# Altium PCB BEE-PC_EXP_V100.PcbDoc (part 5 of 7)
Units mm, origin at the board's own origin, x right, y up, seen from the top; angles counter-clockwise.
Board outline 180 x 79.98 mm, 6 copper layers (L1 TOP, L2 GND 1, L3 SIGNAL, L4 PWR, L5 GND 2, L6 BOT), stack 1.536 mm thick; 1146 components, 909 nets, 3933 pads, 1234 vias.
Unrouted connection lines stored in the file: 1783.
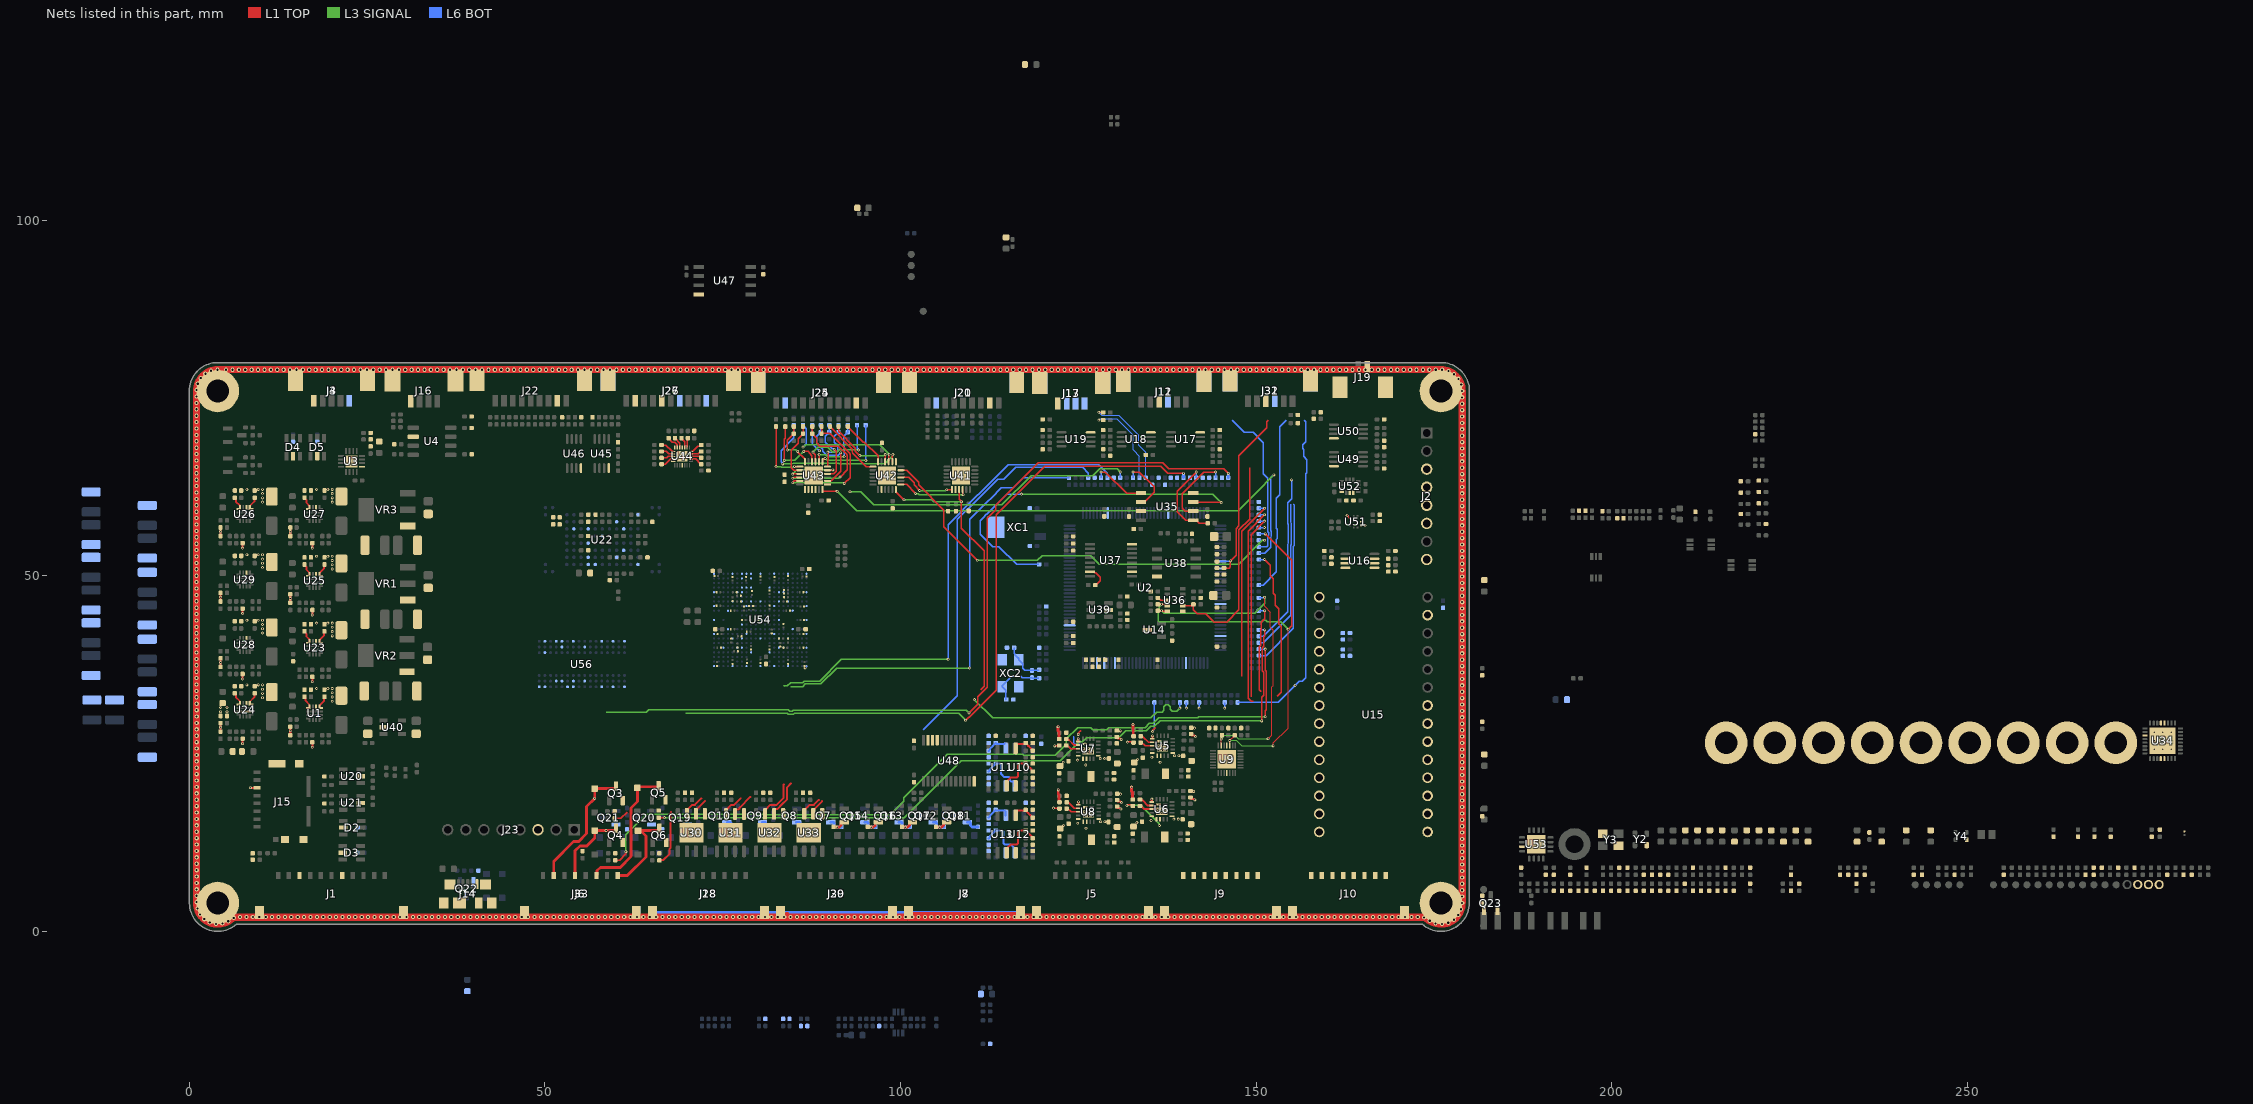
[diagram p5: the nets of this part, all layers, seen from the top]

## Via types
v1: diameter 0.6, hole 0.3, L1 TOP to L6 BOT, 563 vias
v2: diameter 0.4, hole 0.2, L1 TOP to L6 BOT, tented both sides, 344 vias
v3: diameter 0.4, hole 0.2, L1 TOP to L6 BOT, 327 vias

## Nets (pads, with @x,y where several pads share a name; then routed paths per layer and width w, separated by ;. In a path a pad name is that pad's centre, name@x,y a point inside that pad or via, vN(x,y) a via of type N, cw(c..) or ccw(c..) an arc to the next point about the centre after c; other vN are vias at no path point) (continued)
GND: C1.1 C2.1 C3.1 C4.1 C5.1 C6.2 C7.1 C8.1 C9.1 C10.1 C11.1 C12.1 C13.1 C14.1 C15.1 C16.1 C17.2 C18.2 C19.1 C20.1 C21.1 C22.1 C23.1 C24.1 C25.1 C26.1 C27.1 C28.1 C29.1 C30.1 C31.1 C32.1 C33.1 C34.1 C35.1 C36.1 C37.1 C38.1 C39.1 C40.1 C41.1 C42.1 C43.1 C44.1 C45.1 C46.1 C47.1 C48.1 C49.1 C50.1 C53.1 C54.1 C57.1 C58.1 C59.1 C60.1 C61.1 C62.1 C63.1 C64.1 C65.1 C66.1 C67.1 C68.1 C69.1 C70.1 C71.1 C72.1 C75.1 C76.1 C79.1 C80.1 C81.1 C82.1 C83.1 C84.1 C85.1 C86.1 C87.1 C88.1 C89.1 C90.1 C91.1 C92.1 C93.1 C94.1 C95.1 C96.1 C97.1 C98.1 C99.1 C100.1 C101.1 C102.1 C103.1 C104.1 C105.1 C106.1 C107.1 C108.1 C109.1 C110.1 C111.1 C112.1 C113.1 C114.1 C115.1 C116.1 C117.1 C118.1 C119.1 C120.1 C121.1 C122.1 C123.1 C124.1 C125.1 C126.1 C127.1 C128.1 C129.1 C130.1 C131.1 C132.1 C133.1 C134.1 C135.1 C136.1 C137.1 C138.1 C139.1 C140.1 C141.1 C142.2 C143.1 C144.1 C145.1 C146.1 C147.1 C148.1 C149.1 C150.1 C151.1 C152.1 C153.1 C154.1 C155.1 C156.1 C157.2 C158.1 C159.1 C160.1 C161.1 C162.1 C163.1 C164.1 C165.1 C166.1 C167.1 C168.1 C169.1 C170.1 C171.1 C172.1 C173.1 C174.1 C175.2 C176.1 C177.1 C178.1 C179.1 C180.2 C181.1 C182.2 C183.2 C184.1 C185.1 C186.1 C187.1 C188.1 C189.1 C190.2 C191.1 C192.1 C193.1 C194.1 C195.1 C196.1 C197.1 C198.1 C199.1 C200.1 C201.1 C202.1 C203.1 C204.1 C205.1 C206.1 C207.1 C208.1 C209.1 C210.1 C211.1 C212.1 C213.1 C214.1 C215.1 C216.1 C217.1 C218.1 C219.1 C220.2 C221.2 C222.2 C223.2 C224.1 C225.2 C226.1 C227.2 C228.1 C229.2 C230.2 C231.2 C232.2 C233.2 C234.2 C235.2 C236.2 C237.2 C238.2 C239.2 C240.2 C241.2 C242.2 C243.2 C244.2 C245.2 C246.2 C247.2 C248.2 C249.2 C250.2 C251.2 C252.2 C253.1 C254.2 C255.2 C256.2 C257.2 C258.2 C259.2 C260.2 C261.2 C262.2 C263.2 C264.2 C265.2 C266.2 C267.2 C268.2 C269.2 C270.2 C271.2 C272.2 C273.1 C274.2 C275.2 C276.2 C277.2 C278.2 C279.2 C280.2 C281.2 C282.2 C283.2 C284.2 C285.1 C286.2 C287.1 C288.2 C289.1 C290.1 C292.1 C294.1 C296.1 C298.1 C300.1 C302.1 C304.1 C306.1 C308.1 C310.1 C312.1 C314.1 C316.1 C318.1 C320.1 C322.1 C324.1 C326.1 C328.1 C330.1 C331.2 C332.2 C333.2 C334.2 C335.2 C336.2 C337.2 C338.2 C340.2 C341.2 C342.2 C343.2 C344.2 C345.2 C346.2 C347.2 C348.2 C349.2 C350.2 C353.2 C354.2 D1.2 D2.2 D3.2 D4.2 D5.2 D10.2 D11.2 D12.2 D13.2 D14.2 D15.2 D16.2 H2.1 H3.1 H4.1 H5.1 H7.1 H8.1 H9.1 H10.1 H11.1 H12.1 H13.1 H14.1 H15.1 J1.3 J1.7 J1.M1 J1.M2 J2.3 J3.5 J3.M1 J3.M2 J4.5 J4.M1 J4.M2 J5.M1 J5.M2 J6.M1 J6.M2 J7.M1 J7.M2 J8.M1 J8.M2 J9.M1 J9.M2 J10.M1 J10.M2 J11.4 J11.M1 J11.M2 J12.4 J12.M1 J12.M2 J13.4 J13.M1 J13.M2 J14.5 J14.6 J15.G1 J15.G2 J15.G3 J15.G4 J15.P6 J16.4 J16.M1 J16.M2 J17.4 J17.M1 J17.M2 J18.M1 J18.M2 J19.2 J19.M1 J19.M2 J20.2 J20.M1 J20.M2 J21.2 J21.M1 J21.M2 J22.2 J22.M1 J22.M2 J23.3 J24.2 J24.M1 J24.M2 J25.2 J25.M1 J25.M2 J26.7 J26.10 J26.M1 J26.M2 J27.7 J27.10 J27.M1 J27.M2 J28.M1 J28.M2 J29.M1 J29.M2 J30.M1 J30.M2 J31.4 J31.M1 J31.M2 J32.4 J32.M1 J32.M2 J33.M1 J33.M2 Q3.2 Q4.2 Q5.2 Q6.2 Q7.2 Q8.2 Q9.2 Q10.2 Q11.2 Q12.2 Q13.2 Q14.2 Q15.2 Q16.2 Q17.2 Q18.2 Q19.2 Q20.2 Q21.2 Q22.2 Q23.2 R6.1 R7.2 R8.1 R83.1 R88.2 R89.2 R95.2 R96.2 R103.2 R105.2 R111.2 R113.2 R115.2 R119.1 R120.1 R122.1 R126.1 R128.1 R130.1 R132.1 R137.1 R138.1 R143.1 R144.1 R149.1 R150.1 R155.1 R156.1 R159.1 R161.1 R168.2 R174.1 R175.1 R178.2 R182.2 R190.2 R221.1 R226.1 R228.1 R229.2 R230.1 R241.1 R242.1 R243.2 R244.2 R245.1 R246.1 R254.1 R255.2 R259.2 R260.1 R261.1 R262.1 R268.2 R269.1 R270.1 R272.2 R273.2 R275.2 R276.2 R278.2 R279.2 R281.2 R282.2 R314.1 R319.1 R320.2 R329.1 R338.1 R340.2 R344.1 R347.1 R348.2 R350.2 R352.2 R354.2 R358.1 R360.1 R401.1 R402.1 R422.1 R449.1 R466.2 R473.2 R477.1 R483.1 R484.1 R485.1 R486.1 R491.1 R492.1 R493.1 R494.1 R499.1 R500.1 R501.1 R502.1 R507.2 R512.1 R513.1 R514.1 R515.1 R532.2 R534.2 R536.1 R543.1 R547.1 R549.1 R551.1 R572.2 R573.2 R575.1 R578.2 TP4.0 U1.8 U2.8 U2.44 U2.61 U2.95 U2.115 U2.135 U2.138 U3.1 U3.17 U4.6 U5.1 U5.5 U5.10 U5.19 U5.21 U5.22 U6.1 U6.5 U6.10 U6.19 U6.21 U6.22 U7.1 U7.5 U7.10 U7.19 U7.21 U7.22 U8.1 U8.5 U8.10 U8.19 U8.21 U8.22 U9.11 U9.25 U9.29 U10.4 U11.4 U12.4 U13.4 U14.3 U15.1 U15.27 U16.4 U17.4 U18.4 U19.4 U20.2 U21.2 U22.G2@56.086,58.6 U22.G3@56.086,57.6 U22.G4@56.086,56.6 U22.G5@56.086,55.6 U22.G6@56.086,54.6 U22.G7@56.086,53.6 U22.G8@56.086,52.6 U22.G9@56.086,51.6 U22.H2@57.086,58.6 U22.H9@57.086,51.6 U22.J5@58.086,55.6 U22.L3@60.086,57.6 U22.L8@60.086,52.6 U22.M4@61.086,56.6 U22.M7@61.086,53.6 U22.P2@63.086,58.6 U22.P9@63.086,51.6 U23.8 U24.8 U25.8 U26.8 U27.8 U28.8 U29.8 U30.1 U30.EPAD U31.1 U31.EPAD U32.1 U32.EPAD U33.1 U33.EPAD U34.3 U34.12 U34.13 U34.28 U34.29 U34.33 U35.4 U36.6 U37.8 U38.4 U39.2 U40.2 U41.2 U41.25 U42.2 U42.25 U43.2 U43.25 U44.5 U44.9 U44.21 U44.24 U44.25 U45.4 U46.4 U47.4 U48.12 U48.21 U49.4 U50.4 U51.3 U51.8 U51.9 U52.6 U52.7 U53.3 U53.17 U54.A1 U54.A5 U54.A8 U54.A11 U54.A14 U54.A17 U54.A21 U54.AA1 U54.AA8 U54.AA11 U54.AA14 U54.AA17 U54.AA21 U54.D9 U54.D13 U54.E1 U54.E7 U54.E15 U54.E21 U54.F5 U54.F17 U54.G5 U54.G7 U54.G11 U54.G15 U54.G17 U54.H1 U54.H8 U54.H14 U54.H21 U54.J4 U54.J18 U54.K11 U54.L1 U54.L7 U54.L11 U54.L15 U54.L21 U54.N4 U54.N18 U54.P1 U54.P8 U54.P14 U54.P21 U54.R5 U54.R7 U54.R11 U54.R15 U54.R17 U54.T5 U54.T17 U54.U1 U54.U7 U54.U15 U54.U21 U54.V9 U54.V13 U54.W5 U56.A9 U56.B1 U56.B3 U56.B9 U56.D1 U56.D8 U56.E1 U56.E2 U56.E8 U56.F9 U56.G1 U56.G8 U56.G9 U56.J2 U56.J8 U56.M1 U56.M9 U56.P1 U56.P9 U56.T1 U56.T9 VR1.1 VR2.1 VR3.1 XC1.3 XC2.2 XC2.4 Y2.2 Y3.2 Y3.4 Y4.2 | length 635.7
  L1 TOP w0.2: v3(162.8,58.5) 163.2,58.1 U51.3@163.213,58.1 ; U51.8@164.787,57.1 v3(165.3,57.1)
  L1 TOP w0.25: v2(125,27.7) 125.029,27.729 125.029,27.915 125.314,28.2 125.325,28.2
  L1 TOP w0.254: J30.M1@83.567,2.258 83.893,2.583 84.143,2.583 84.17,2.61 ; J30.M2@98.785,2.61 J30.M2@98.855,2.68 ; J8.M1@101.145,2.61 116.785,2.61 J8.M2@116.855,2.68
  L1 TOP w0.28: v3(8.6,20.2) J15.P6@9.5,20.2 ; R113.2@130.325,27.31 130.489,27.146 130.871,27.146 131.018,27 v2(131.05,27) ; R115.2@130.361,18.428 130.525,18.264 130.908,18.264 131.054,18.118 v2(131.086,18.118) ; R105.2@140.675,18.81 140.839,18.646 141.221,18.646 141.368,18.5 v2(141.4,18.5) ; R103.2@140.775,27.71 140.939,27.546 141.321,27.546 141.468,27.4 v2(141.5,27.4)
  L1 TOP w0.3: R228.1@4.4,28.133 v2(4.4,28.714) C141.1@4.4,29.295 ; R260.1@4.4,37.233 v2(4.4,37.814) C151.1@4.4,38.395 ; R269.1@4.4,46.433 v2(4.4,47.014) C172.1@4.4,47.595 ; R242.1@4.4,55.633 v2(4.4,56.214) C152.1@4.4,56.795 ; v3(7.5,26.4) R229.2@7.5,27.075 ; v3(7.5,35.5) R259.2@7.5,36.175 ; v3(7.5,44.7) R268.2@7.5,45.375 ; v3(7.5,53.9) R244.2@7.5,54.575 ; R6.1@14.2,27.633 v2(14.2,28.214) C3.1@14.2,28.795 ; R241.1@14.2,46.233 v2(14.2,46.814) C165.1@14.2,47.395 ; R254.1@14.2,55.633 v2(14.2,56.214) C162.1@14.2,56.795 ; v3(17.3,25.9) R7.2@17.3,26.575 ; v3(17.3,35.1) R221.1@17.3,35.775 ; v3(17.3,44.5) R243.2@17.3,45.175 ; v3(17.3,53.9) R255.2@17.3,54.575 ; U7.1@124.988,26.725 124.988,27.088 v2(125,27.1) ; U8.1@125.024,17.843 125.024,18.206 v2(125.036,18.218) ; C75.1@130.325,28.2 v2(130.9,28.2) ; C76.1@130.361,19.318 v2(130.936,19.318) ; U6.1@135.337,18.225 135.337,18.588 v2(135.35,18.6) ; U5.1@135.437,27.125 135.437,27.488 v2(135.45,27.5) ; C54.1@140.675,19.7 v2(141.25,19.7) ; C53.1@140.775,28.6 v2(141.35,28.6)
  L1 TOP w0.4: R499.1@90.6,14.675 v3(91.1,14.675) 91.415,14.675 91.649,14.909 91.649,15.25 91.749,15.35 Q15.2@92.1,15.35 ; R500.1@95.4,14.675 v3(95.9,14.675) 96.215,14.675 96.449,14.909 96.449,15.25 96.549,15.35 Q16.2@96.9,15.35 ; R501.1@100.2,14.675 v3(100.7,14.675) 101.015,14.675 101.249,14.909 101.249,15.25 101.349,15.35 Q17.2@101.7,15.35 ; R502.1@105,14.675 v3(105.5,14.675) 105.815,14.675 106.049,14.909 106.049,15.25 106.149,15.35 Q18.2@106.5,15.35 ; v2(122.157,28.793) 122.157,28.2 122.257,28.1 122.275,28.1 C81.1@122.275,27.2 ; v2(122.194,19.911) 122.194,19.318 122.294,19.218 122.311,19.218 C82.1@122.311,18.318 ; v2(132.507,20.293) 132.507,19.7 132.607,19.6 132.625,19.6 C60.1@132.625,18.7 ; v2(132.7,29.1) 132.7,28.525 132.725,28.5 C59.1@132.725,27.6
  L1 TOP w1: v1@1,75.993 1,75.222 1,74.322 1.001,73.422 1.001,72.522 1.001,71.622 1.001,70.722 1.002,69.822 1.002,68.922 1.002,68.022 1.002,67.122 1.003,66.222 1.003,65.322 1.003,64.422 1.003,63.522 1.004,62.622 1.004,61.722 1.004,60.822 1.004,59.922 1.005,59.022 1.005,58.122 1.005,57.222 1.005,56.322 1.006,55.422 1.006,54.522 1.006,53.622 1.006,52.722 1.007,51.822 1.007,50.922 1.007,50.022 1.007,49.122 1.008,48.222 1.008,47.322 1.008,46.422 1.008,45.522 1.009,44.622 1.009,43.722 1.009,42.822 1.009,41.922 1.01,41.022 1.01,40.122 1.01,39.222 1.01,38.322 1.01,37.422 1.011,36.522 1.011,35.622 1.011,34.722 1.011,33.822 1.012,32.922 1.012,32.022 1.012,31.122 1.012,30.222 1.013,29.322 1.013,28.422 1.013,27.522 1.013,26.622 1.014,25.722 1.014,24.822 1.014,23.922 1.014,23.022 1.015,22.122 1.015,21.222 1.015,20.322 1.015,19.422 1.016,18.522 1.016,17.622 1.016,16.722 1.016,15.822 1.017,14.922 1.017,14.022 1.017,13.122 1.017,12.222 1.018,11.322 1.018,10.422 1.018,9.522 1.018,8.622 1.019,7.722 1.019,6.822 1.019,5.922 1.019,5.022 1.02,4.122 H10.1@1.02,3.999 ; v1@1,76 cw(c4,76) 4,79 176,79 cw(c176,76) v1@179,76.002 ; H10.1@1.02,3.999 1.02,3.981 ccw(c4,4) 5.96,1.755 cw(c6.618,1.001) 6.672,2 19.742,2 20.642,2 47.642,2 48.542,2 J18.M1@64.742,2 ; v1(64.742,2.018) J18.M1@64.742,2 ; v1(65.642,2.018) J18.M1@65.642,2 ; v1(66.542,2.018) v1@66.542,2 ; v1(67.442,2.018) v1@67.442,2 ; v1(80.042,2.018) v1@80.042,2 ; v1(80.942,2.018) J18.M2@80.942,2 ; v1(81.842,2.018) v1@81.842,2 ; v1(82.742,2.018) J30.M1@82.742,2 ; J30.M1@82.787,2 J30.M1@83.687,2 ; J30.M1@83.145,2 J30.M1@82.742,2 ; v1(84.542,2.018) J30.M1@83.687,2 ; v1(98.042,2.018) v1@98.042,2 ; J30.M2@98.942,2 v1@99.842,2 ; v1(98.942,2.018) 98.873,2.018 98.855,2 v1@98.042,2 ; v1(99.842,2.018) v1@99.842,2 ; v1(100.742,2.018) 100.742,2 v1@99.842,2 ; J8.M1@101.145,2 J8.M1@101.642,2 ; v1(101.642,2.018) J8.M1@101.642,2 ; v1(102.542,2.018) v1@102.542,2 ; v1(115.142,2.018) v1@115.142,2 ; v1(116.042,2.018) v1@116.042,2 ; J8.M2@116.855,2 v1@116.042,2 ; v1(116.942,2.018) 116.942,2 v1@117.842,2 ; v1(117.842,2.018) v1@117.842,2 ; H14.1@179,76 179,75.1 179,74.2 179,71.5 179,70.6 179,67.9 179,67 179,65.2 179,64.3 179,61.6 179,60.7 179,58.9 179,58 179,55.3 179,54.4 179,51.7 179,50.8 179,49 179,48.1 179,45.4 179,44.5 179,41.8 179,40.9 179,39.1 179,38.2 179,35.5 179,34.6 179,32.8 179,31.9 179,29.2 179,28.3 179,25.6 179,24.7 179,22.9 179,22 179,19.3 179,18.4 179,15.7 179,14.8 179,13 179,12.1 179,9.4 179,8.5 179,6.7 179,5.8 179,4.175 ccw(c179.98,3.978) 178.98,3.983 cw(c176,4) 174.04,1.755 ccw(c173.382,1.001) 173.328,2 160.142,2 159.242,2 132.242,2 131.342,2 v1@117.842,2 ; J18.M1@64.742,2 J18.M1@65.642,2 ; J18.M1@65.642,2 v1@66.542,2 ; v1@66.542,2 v1@67.442,2 ; v1@67.442,2 75.542,2 76.442,2 v1@80.042,2 ; v1@80.042,2 J18.M2@80.942,2 ; J18.M2@80.942,2 v1@81.842,2 ; v1@81.842,2 J30.M1@82.742,2 ; J30.M1@83.687,2 84.542,2 85.442,2 v1@98.042,2 ; J8.M1@101.642,2 v1@102.542,2 ; v1@102.542,2 103.442,2 104.342,2 v1@115.142,2 ; v1@115.142,2 v1@116.042,2
  L6 BOT w0.2: v3(86.584,37.052) 86.584,37.068 86.8,37.284 U54.A1@86.8,37.3 ; 124.3,27.4 124.338,27.362 124.338,26.467 124.455,26.35 v2(125.925,26.35)
  L6 BOT w0.4: v1(64.742,2.018) 65.404,2.68 66.304,2.68 ; v1(65.642,2.018) 66.304,2.68 ; Q10.2@75.7,15.35 76.051,15.35 76.151,15.25 76.151,14.909 76.385,14.675 R486.1@77.2,14.675 ; Q9.2@80.6,15.35 80.951,15.35 81.051,15.25 81.051,14.909 81.285,14.675 R485.1@82.1,14.675 ; v1(80.942,2.018) 81.604,2.68 ; Q8.2@85.4,15.35 85.751,15.35 85.851,15.25 85.851,14.909 86.085,14.675 R484.1@86.9,14.675 ; Q7.2@90.2,15.35 90.551,15.35 90.651,15.25 90.651,14.909 90.885,14.675 R483.1@91.7,14.675 ; Q14.2@95,15.35 95.351,15.35 95.451,15.25 95.451,14.909 95.685,14.675 R494.1@96.5,14.675 ; Q13.2@99.8,15.35 100.151,15.35 100.251,15.25 100.251,14.909 100.485,14.675 R493.1@101.3,14.675 ; Q12.2@104.6,15.35 104.951,15.35 105.051,15.25 105.051,14.909 105.285,14.675 R492.1@106.1,14.675 ; Q11.2@109.4,15.35 109.751,15.35 109.851,15.25 109.851,14.909 110.085,14.675 R491.1@110.9,14.675 ; J7.M1@116.855,2.68 J7.M2@101.145,2.68 J29.M1@98.855,2.68 J29.M2@83.145,2.68 81.604,2.68 ; 66.304,2.68 J28.M1@80.855,2.68 81.604,2.68
  other v1: 3.746,1.052 176.14,1.043 4.644,1.111 175.245,1.138 177.022,1.22 2.872,1.264 5.483,1.438 174.42,1.498 177.81,1.654 2.102,1.73 6.248,1.911 173.639,1.945 7.142,2.018 8.042,2.018 8.942,2.018 9.842,2.018 10.742,2.018 11.642,2.018 12.542,2.018 13.442,2.018 14.342,2.018 15.242,2.018 16.142,2.018 17.042,2.018 17.942,2.018 18.842,2.018 19.742,2.018 20.642,2.018 21.542,2.018 22.442,2.018 23.342,2.018 24.242,2.018 25.142,2.018 26.042,2.018 26.942,2.018 27.842,2.018 28.742,2.018 29.642,2.018 30.542,2.018 31.442,2.018 32.342,2.018 33.242,2.018 34.142,2.018 35.042,2.018 35.942,2.018 36.842,2.018 37.742,2.018 38.642,2.018 39.542,2.018 40.442,2.018 41.342,2.018 42.242,2.018 43.142,2.018 44.042,2.018 44.942,2.018 45.842,2.018 46.742,2.018 47.642,2.018 48.542,2.018 49.442,2.018 50.342,2.018 51.242,2.018 52.142,2.018 53.042,2.018 53.942,2.018 54.842,2.018 55.742,2.018 56.642,2.018 57.542,2.018 58.442,2.018 59.342,2.018 60.242,2.018 61.142,2.018 62.042,2.018 62.942,2.018 63.842,2.018 68.342,2.018 69.242,2.018 70.142,2.018 71.042,2.018 71.942,2.018 72.842,2.018 73.742,2.018 74.642,2.018 75.542,2.018 76.442,2.018 77.342,2.018 78.242,2.018 79.142,2.018 83.642,2.018 85.442,2.018 86.342,2.018 87.242,2.018 88.142,2.018 89.042,2.018 89.942,2.018 90.842,2.018 91.742,2.018 92.642,2.018 93.542,2.018 94.442,2.018 95.342,2.018 96.242,2.018 97.142,2.018 103.442,2.018 104.342,2.018 105.242,2.018 106.142,2.018 107.042,2.018 107.942,2.018 108.842,2.018 109.742,2.018 110.642,2.018 111.542,2.018 112.442,2.018 113.342,2.018 114.242,2.018 118.742,2.018 119.642,2.018 120.542,2.018 121.442,2.018 122.342,2.018 123.242,2.018 124.142,2.018 125.042,2.018 125.942,2.018 126.842,2.018 127.742,2.018 128.642,2.018 129.542,2.018 130.442,2.018 131.342,2.018 132.242,2.018 133.142,2.018 134.042,2.018 134.942,2.018 135.842,2.018 136.742,2.018 137.642,2.018 138.542,2.018 139.442,2.018 140.342,2.018 141.242,2.018 142.142,2.018 143.042,2.018 143.942,2.018 144.842,2.018 145.742,2.018 146.642,2.018 147.542,2.018 148.442,2.018 149.342,2.018 150.242,2.018 151.142,2.018 152.042,2.018 152.942,2.018 153.842,2.018 154.742,2.018 155.642,2.018 156.542,2.018 157.442,2.018 158.342,2.018 159.242,2.018 160.142,2.018 161.042,2.018 161.942,2.018 162.842,2.018 163.742,2.018 164.642,2.018 165.542,2.018 166.442,2.018 167.342,2.018 168.242,2.018 169.142,2.018 170.042,2.018 170.942,2.018 171.842,2.018 172.742,2.018 178.432,2.305 1.507,2.405 178.83,3.112 1.142,3.228 178.975,4 1.038,4.122 178.982,4.9 1.038,5.022 178.982,5.8 1.037,5.922 178.982,6.7 1.037,6.822 178.982,7.6 1.037,7.722 178.982,8.5 1.037,8.622 178.982,9.4 1.036,9.522 178.982,10.3 1.036,10.422 178.982,11.2 1.036,11.322 178.982,12.1 1.036,12.222 178.982,13 1.035,13.122 178.982,13.9 1.035,14.022 178.982,14.8 1.035,14.922 178.982,15.7 1.035,15.822 178.982,16.6 1.034,16.722 178.982,17.5 1.034,17.622 178.982,18.4 1.034,18.522 178.982,19.3 1.034,19.422 178.982,20.2 1.034,20.322 178.982,21.1 1.033,21.222 178.982,22 1.033,22.122 178.982,22.9 1.033,23.022 178.982,23.8 1.033,23.922 178.982,24.7 1.032,24.822 178.982,25.6 1.032,25.722 178.982,26.5 1.032,26.622 178.982,27.4 1.032,27.522 178.982,28.3 1.031,28.422 178.982,29.2 1.031,29.322 178.982,30.1 1.031,30.222 178.982,31 1.031,31.122 178.982,31.9 1.03,32.022 178.982,32.8 1.03,32.922 178.982,33.7 1.03,33.822 178.982,34.6 1.03,34.722 178.982,35.5 1.029,35.622 178.982,36.4 1.029,36.522 178.982,37.3 1.029,37.422 178.982,38.2 1.029,38.322 178.982,39.1 1.028,39.222 178.982,40 1.028,40.122 178.982,40.9 1.028,41.022 178.982,41.8 1.028,41.922 178.982,42.7 1.027,42.822 178.982,43.6 1.027,43.722 178.982,44.5 1.027,44.622 178.982,45.4 1.027,45.522 178.982,46.3 1.026,46.422 178.982,47.2 1.026,47.322 178.982,48.1 1.026,48.222 178.982,49 1.026,49.122 178.982,49.9 1.025,50.022 178.982,50.8 1.025,50.922 178.982,51.7 1.025,51.822 178.982,52.6 1.025,52.722 178.982,53.5 1.024,53.622 178.982,54.4 1.024,54.522 178.982,55.3 1.024,55.422 178.982,56.2 1.024,56.322 178.982,57.1 1.023,57.222 178.982,58 1.023,58.122 178.982,58.9 1.023,59.022 178.982,59.8 1.023,59.922 178.982,60.7 1.022,60.822 178.982,61.6 1.022,61.722 178.982,62.5 1.022,62.622 178.982,63.4 1.022,63.522 178.982,64.3 1.022,64.422 178.982,65.2 1.021,65.322 178.982,66.1 1.021,66.222 178.982,67 1.021,67.122 178.982,67.9 1.021,68.022 178.982,68.8 1.02,68.922 178.982,69.7 1.02,69.822 178.982,70.6 1.02,70.722 178.982,71.5 1.02,71.622 178.982,72.4 1.019,72.522 178.982,73.3 1.019,73.422 178.982,74.2 1.019,74.322 178.982,75.1 1.019,75.222 178.978,76 1.022,76.122 178.849,76.891 1.192,77.005 178.452,77.699 1.619,77.798 177.833,78.352 2.261,78.428 177.047,78.79 3.063,78.836 3.951,78.984 5.167,78.982 6.067,78.982 6.967,78.982 7.867,78.982 8.767,78.982 9.667,78.982 10.567,78.982 11.467,78.982 12.367,78.982 13.267,78.982 14.167,78.982 15.067,78.982 15.967,78.982 16.867,78.982 17.767,78.982 18.667,78.982 19.567,78.982 20.467,78.982 21.367,78.982 22.267,78.982 23.167,78.982 24.067,78.982 24.967,78.982 25.867,78.982 26.767,78.982 27.667,78.982 28.567,78.982 29.467,78.982 30.367,78.982 31.267,78.982 32.167,78.982 33.067,78.982 33.967,78.982 34.867,78.982 35.767,78.982 36.667,78.982 37.567,78.982 38.467,78.982 39.367,78.982 40.267,78.982 41.167,78.982 42.067,78.982 42.967,78.982 43.867,78.982 44.767,78.982 45.667,78.982 46.567,78.982 47.467,78.982 48.367,78.982 49.267,78.982 50.167,78.982 51.067,78.982 51.967,78.982 52.866,78.982 53.766,78.982 54.666,78.982 55.566,78.982 56.466,78.982 57.366,78.982 58.266,78.982 59.166,78.982 60.066,78.982 60.966,78.982 61.866,78.982 62.766,78.982 63.666,78.982 64.566,78.982 65.466,78.982 66.366,78.982 67.266,78.982 68.166,78.982 69.066,78.982 69.966,78.982 70.866,78.982 71.766,78.982 72.666,78.982 73.566,78.982 74.466,78.982 75.366,78.982 76.266,78.982 77.166,78.982 78.066,78.982 78.966,78.982 79.866,78.982 80.766,78.982 81.666,78.982 82.566,78.982 83.466,78.982 84.366,78.982 85.266,78.982 86.166,78.982 87.066,78.982 87.966,78.982 88.866,78.982 89.766,78.982 90.666,78.982 91.566,78.982 92.466,78.982 93.366,78.982 94.266,78.982 95.166,78.982 96.066,78.982 96.966,78.982 97.866,78.982 98.766,78.982 99.666,78.982 100.566,78.982 101.466,78.982 102.366,78.982 103.266,78.982 104.166,78.982 105.066,78.982 105.966,78.982 106.866,78.982 107.766,78.982 108.666,78.982 109.566,78.982 110.466,78.982 111.366,78.982 112.266,78.982 113.166,78.982 114.066,78.982 114.966,78.982 115.866,78.982 116.766,78.982 117.666,78.982 118.566,78.982 119.466,78.982 120.366,78.982 121.266,78.982 122.166,78.982 123.066,78.982 123.966,78.982 124.866,78.982 125.766,78.982 126.666,78.982 127.566,78.982 128.466,78.982 129.366,78.982 130.266,78.982 131.166,78.982 132.066,78.982 132.966,78.982 133.866,78.982 134.766,78.982 135.666,78.982 136.566,78.982 137.466,78.982 138.366,78.982 139.266,78.982 140.166,78.982 141.066,78.982 141.966,78.982 142.866,78.982 143.766,78.982 144.666,78.982 145.566,78.982 146.466,78.982 147.366,78.982 148.266,78.982 149.166,78.982 150.066,78.982 150.966,78.982 151.866,78.982 152.766,78.982 153.666,78.982 154.566,78.982 155.466,78.982 156.366,78.982 157.266,78.982 158.166,78.982 159.066,78.982 159.966,78.982 160.866,78.982 161.766,78.982 162.666,78.982 163.566,78.982 164.466,78.982 165.366,78.982 166.266,78.982 167.166,78.982 168.066,78.982 168.966,78.982 169.866,78.982 170.766,78.982 171.666,78.982 172.566,78.982 173.466,78.982 174.366,78.982 175.266,78.982 176.166,78.975
  other v2: 122.936,14.918 124.936,15.218 133.25,15.3 128.136,15.418 128.736,15.418 135.25,15.6 138.45,15.8 139.05,15.8 125.836,16.218 126.436,16.218 127.036,16.218 136.15,16.6 136.75,16.6 137.35,16.6 125.836,16.818 126.436,16.818 127.036,16.818 136.15,17.2 136.75,17.2 137.35,17.2 122.9,23.8 124.9,24.1 133.35,24.2 128.1,24.3 128.7,24.3 135.35,24.5 138.55,24.7 139.15,24.7 125.8,25.1 126.4,25.1 127,25.1 136.25,25.5 136.85,25.5 137.45,25.5 276.27,25.596 277.47,25.596 278.67,25.596 125.8,25.7 126.4,25.7 127,25.7 136.25,26.1 136.85,26.1 137.45,26.1 276.27,26.796 277.47,26.796 278.67,26.796 276.27,27.996 277.47,27.996 278.67,27.996 20.092,32.365 10.292,32.865 20.092,32.965 10.292,33.465 20.092,33.565 10.292,34.065 17.893,34.165 19.492,34.165 20.092,34.165 8.093,34.665 9.692,34.665 10.292,34.665 20.092,41.565 10.292,41.965 20.092,42.165 10.292,42.565 20.092,42.765 10.292,43.165 17.893,43.365 19.492,43.365 20.092,43.365 8.093,43.765 9.692,43.765 10.292,43.765 20.092,50.965 10.292,51.165 20.092,51.565 10.292,51.765 20.092,52.165 10.292,52.365 17.893,52.765 19.492,52.765 20.092,52.765 8.093,52.965 9.692,52.965 10.292,52.965 10.292,60.365 20.092,60.365 10.292,60.965 20.092,60.965 10.292,61.565 20.092,61.565 8.093,62.165 9.692,62.165 10.292,62.165 17.893,62.165 19.492,62.165 20.092,62.165
HD4_A0: R158.2 R159.2 U15.3
HD4_A1: R160.2 R161.2 U15.4
HD4_CH11+: J10.7 U15.16
HD4_CH11-: J10.8 U15.15
HD4_CH12+: J10.6 U15.17
HD4_CH12-: J10.5 U15.18
HD4_CH21+: J10.3 U15.20
HD4_CH21-: J10.4 U15.19
HD4_CH22+: J10.2 U15.21
HD4_CH22-: J10.1 U15.22
HD4_CH31+: J9.2 U15.8
HD4_CH31-: J9.1 U15.7
HD4_CH32+: J9.3 U15.9
HD4_CH32-: J9.4 U15.10
HD4_CH41+: J9.6 U15.12
HD4_CH41-: J9.5 U15.11
HD4_CH42+: J9.7 U15.13
HD4_CH42-: J9.8 U15.14
HEATER_B_1: D6.2 J6.2 Q3.3 | length 18.2
  L1 TOP w0.4: J6.2@51.25,7.87 51.25,9.85 54.025,12.625 54.752,12.625 55.876,13.749 55.876,17.576 57.003,18.703 D6.2@57.003,20.081 59.9,20.081 Q3.3@59.9,20.4
  other v3: 57,18.7
HEATER_B_2: D7.2 J6.4 Q4.3 | length 11.3
  L1 TOP w0.4: J6.4@54.25,7.87 54.25,11.353 54.922,12.025 55.897,12.025 57.003,13.131 D7.2@57.003,14.181 58.581,14.181 v3(58.6,14.2) 59.9,14.2 60,14.3 Q4.3@60,14.5
HEATER_B_3: D8.2 J6.6 Q5.3 | length 19.5
  L1 TOP w0.4: J6.6@57.25,7.87 57.35,7.97 57.35,8.55 57.8,9 60.6,9 62.125,10.525 62.125,17.377 63.003,18.255 D8.2@63.003,20.181 63.163,20.341 65.9,20.341 66,20.441 Q5.3@66,20.5
HEATER_B_4: D9.2 J6.8 Q6.3 | length 12.3
  L1 TOP w0.4: J6.8@60.25,7.87 61.582,7.87 64.2,10.488 64.2,13.436 D9.2@63.455,14.181 ; D9.2@63.103,14.181 D9.2@63.455,14.181 ; Q6.3@66.1,14.5 66.1,14.281 66,14.181 D9.2@63.455,14.181
HEATER_PWM_1: R36.2 R125.1 | length 120.7
  L1 TOP w0.2: R125.1@59.825,15.9 60.7,15.9 61.55,16.75 ; v3(109.639,30.739) 110.85,31.95 110.85,32.979 112.2,34.329 112.2,58.066 113.4,59.266 113.4,59.9 119.4,65.9 136.9,65.9 137.75,65.05 145.45,65.05 v3(146.1,64.4)
  L3 SIGNAL w0.2: 58.6,30.8 64.277,30.8 64.627,31.15 84.214,31.15 84.414,30.95 84.786,30.95 84.936,31.1 109.279,31.1 v3(109.639,30.739)
  L6 BOT w0.4: R36.2@146.1,63.825 v3(146.1,64.4)
HEATER_PWM_2: R9.2 R127.1 | length 112.9
  L1 TOP w0.2: R127.1@59.925,10 60.5,10 61.396,10.896 61.396,11.196 v3(61.4,11.2) ; v3(151.3,30.2) 151.3,31 151.46,31.16 151.46,36.601 151.3,36.761 v3(151.3,39.7)
  L3 SIGNAL w0.2: v3(61.4,11.2) 61.4,13.6 64.25,16.45 80.882,16.45 80.932,16.4 98.536,16.4 100.45,18.314 100.45,18.786 106.597,24.933 117.186,24.933 117.369,24.75 121.736,24.75 123.325,26.339 123.325,27.061 124.914,28.65 126.764,28.65 127.064,28.35 129.016,28.35 129.316,28.65 131.101,28.65 134.398,28.65 134.998,29.25 135.548,29.25 136.348,30.05 141.799,30.05 141.949,30.2 v3(151.3,30.2)
  L6 BOT w0.2: R9.2@150.45,39.7 v3(151.3,39.7)
HEATER_PWM_3: R10.2 R129.1 | length 104.3
  L1 TOP w0.2: R129.1@66.025,16 v3(66.8,16) ; v3(150.8,29.6) 150.8,32.934 151.06,33.195 151.06,36.435 150.85,36.646 150.85,39.886 151.06,40.097 151.06,41.434 151.2,41.574 v3(151.2,42.4)
  L3 SIGNAL w0.2: v3(66.8,16) 100.539,16 108.572,24.033 122.497,24.033 125.114,26.65 125.588,26.65 126.188,27.25 130.664,27.25 131.664,28.25 134.563,28.25 135.163,28.85 135.714,28.85 136.514,29.65 150.696,29.65 150.746,29.6 v3(150.8,29.6)
  L6 BOT w0.2: R10.2@150.45,42.4 v3(151.2,42.4)
HEATER_PWM_4: R35.2 R131.1 | length 108.6
  L1 TOP w0.2: v3(109.166,29.7) 109.611,30.146 109.682,30.146 113.456,33.919 113.456,58.592 116.564,61.7 120.264,65.4 136.6,65.4 137.6,64.4 v3(139.8,64.4)
  L1 TOP w0.28: R131.1@66.125,10 66.173,10.048 66.648,10.048 67.553,10.953 67.553,11.606 67.69,11.743 67.69,16.31 67.616,16.384 67.616,16.616 67.766,16.766
  L3 SIGNAL w0.2: 69.8,30.7 84.098,30.7 84.248,30.55 84.952,30.55 85.102,30.7 108.166,30.7 v3(109.166,29.7)
  L6 BOT w0.4: R35.2@139.8,63.825 v3(139.8,64.4)
I2C_SCL: R164.2 U15.6 U16.7
I2C_SDA: R165.2 U15.5 U16.6
L_CAM1_CK_N: R177.1 U44.2 | length 1.8
  L1 TOP w0.18: R177.1@66.425,67.5 67.071,67.5 67.421,67.15 U44.2@68.05,67.15
L_CAM1_CK_P: R176.1 U44.4 | length 1.9
  L1 TOP w0.18: R176.1@66.425,65.7 66.917,65.7 67.666,66.449 68.049,66.449 U44.4@68.05,66.45
L_CAM1_D0_N: R211.1 U44.20 | length 1.5
  L1 TOP w0.18: R211.1@69.2,69.35 69.2,69.325 69.65,68.875 U44.20@69.65,68.05
L_CAM1_D0_P: R187.1 U44.23 | length 2
  L1 TOP w0.18: R187.1@67.4,69.35 67.4,69.325 67.94,68.785 68.248,68.785 68.599,68.434 U44.23@68.6,68.05 U44.23@68.6,68.05
L_CAM1_D1_N: R215.1 U44.15 | length 1.5
  L1 TOP w0.18: U44.15@70.55,66.8 71.718,66.8 71.918,66.6 R215.1@71.975,66.6
L_CAM1_D1_P: R212.1 U44.17 | length 1.8
  L1 TOP w0.18: U44.17@70.55,67.5 70.764,67.5 71.491,68.227 71.802,68.227 R212.1@71.975,68.4
L_CAM2_CK_N: R306.1 U44.1 | length 2
  L1 TOP w0.18: R306.1@66.425,68.4 67.02,68.4 67.835,67.585 67.835,67.501 67.836,67.5 U44.1@68.05,67.5
L_CAM2_CK_P: R216.1 U44.3 | length 1.7
  L1 TOP w0.18: R216.1@66.425,66.6 67.146,66.6 67.346,66.8 U44.3@68.05,66.8
L_CAM2_D0_N: R321.1 U44.19 | length 1.3
  L1 TOP w0.18: U44.19@70,68.05 70.001,68.051 70.001,69.251 R321.1@70.1,69.35
L_CAM2_D0_P: R308.1 U44.22 | length 1.6
  L1 TOP w0.18: R308.1@68.3,69.35 68.3,69.325 68.95,68.675 U44.22@68.95,68.05
L_CAM2_D1_N: R451.1 U44.14 | length 1.7
  L1 TOP w0.18: U44.14@70.55,66.45 71.2,66.45 71.95,65.7 R451.1@71.975,65.7
L_CAM2_D1_P: R450.1 U44.16 | length 1.6
  L1 TOP w0.18: U44.16@70.55,67.15 71.568,67.15 71.918,67.5 R450.1@71.975,67.5
LASER1_ADC_1: R445.1 U43.16 | length 10.4
  L1 TOP w0.2: v3(83.66,66.235) 83.65,66.245 83.65,69.216 83.8,69.366 R445.1@83.8,70.975 ; v3(86.4,67.5) 86.406,67.506 87.015,67.506 87.25,67.271 87.25,67.214 87.55,66.914 U43.16@87.55,66.051
  L3 SIGNAL w0.2: v3(83.66,66.235) 83.675,66.25 85.15,66.25 v3(86.4,67.5)
LASER1_ADC_2: R447.1 U43.19 | length 9.1
  L1 TOP w0.2: v3(82.5,65.356) R447.1@82.5,70.975 ; v3(85.1,65.4) 85.134,65.366 85.833,65.366 U43.19@85.849,65.35
  L3 SIGNAL w0.2: v3(82.5,65.356) 83.21,65.356 83.271,65.295 84.941,65.295 85.046,65.4 v3(85.1,65.4)
LASER1_DAC_LATCH: R424.2 R439.1 U43.22 | length 18.9
  L1 TOP w0.2: v3(84.844,63.727) 84.898,63.727 85.021,63.85 U43.22@85.849,63.85 ; R439.1@87.6,70.975 R424.2@87.6,70 88.223,69.377 88.223,68.69 88.664,68.25 91.286,68.25 92.45,67.086 92.45,67.017 92.525,66.942 92.525,64.925 v3(91.5,63.9)
  L3 SIGNAL w0.2: v3(84.844,63.727) 91.273,63.727 91.446,63.9 v3(91.5,63.9)
LASER1_SPI_MISO: R433.1 U42.16 | length 10
  L1 TOP w0.2: R433.1@91.3,70.975 91.3,70.316 93.65,67.966 93.65,67.514 94.264,66.9 v3(94.3,66.9) ; U42.16@97.85,66.051 97.859,66.06 97.859,67.047 v3(97.868,67.056)
  L3 SIGNAL w0.2: v3(94.3,66.9) 97.658,66.9 97.814,67.056 v3(97.868,67.056)
LASER1_SPI_MOSI: R431.1 U42.18 | length 6.8
  L1 TOP w0.2: R431.1@92.6,70.975 92.6,70.95 94.738,68.812 94.894,68.812 96.85,66.856 U42.18@96.85,66.051
LASER1_SPI_nCS1: R423.2 R437.1 U43.23 | length 19.1
  L1 TOP w0.2: v3(84.844,63.096) 85.098,63.35 U43.23@85.849,63.35 ; R437.1@88.9,70.975 88.9,70.025 90.077,70.025 92.85,67.252 92.85,67.182 92.925,67.108 92.925,63.825 v3(92.1,63)
  L3 SIGNAL w0.2: v3(84.844,63.096) 91.95,63.096 92.046,63 v3(92.1,63)
LASER1_SPI_SCK: R435.1 U42.19 | length 8.7
  L1 TOP w0.2: R435.1@90.1,70.975 90.1,70.95 93.25,67.8 93.25,67.348 93.325,67.273 93.325,67.239 95.214,65.35 U42.19@96.149,65.35
LASER1_SW_EXT_CS: R426.2 R443.1 U43.18 | length 7
  L1 TOP w0.2: v3(84.1,67.7) 84.1,69.1 R426.2@85,70 R443.1@85,70.975 ; v3(85.548,67.5) 85.586,67.462 85.586,67.379 86.523,66.442 86.523,66.078 U43.18@86.55,66.051
  L3 SIGNAL w0.2: v3(84.1,67.7) 85.294,67.7 85.494,67.5 v3(85.548,67.5)
LASER1_SW_INT_CS: R425.2 R441.1 U43.20 | length 7.8
  L1 TOP w0.2: U43.20@85.849,64.85 85.014,64.85 84.65,65.214 84.65,67.664 85.6,68.614 85.6,69.3 R425.2@86.3,70 R441.1@86.3,70.975
LASER2_ADC_1: R446.1 U43.15 | length 12.2
  L1 TOP w0.2: v3(87.7,67.4) 87.7,67.393 88.05,67.043 U43.15@88.05,66.051
  L3 SIGNAL w0.2: v3(87.7,67.4) 88.35,68.05 89.786,68.05 90.486,67.35 91.014,67.35 91.414,67.75 93.996,67.75 94.046,67.7 v3(94.1,67.7)
  L6 BOT w0.2: R446.1@93.9,71.175 93.9,67.954 94.1,67.754 v3(94.1,67.7)
LASER2_ADC_2: R448.1 U43.13 | length 11.5
  L1 TOP w0.2: U43.13@89.05,66.051 89.05,66.393 89.088,66.431 89.276,66.431 89.346,66.5 v3(89.4,66.5)
  L3 SIGNAL w0.2: v3(89.4,66.5) 89.454,66.5 89.704,66.25 95.13,66.25 v3(95.144,66.237)
  L6 BOT w0.2: R448.1@95.1,71.175 95.1,68.663 95.144,68.619 v3(95.144,66.237)
LASER2_DAC_LATCH: R428.2 R440.1 U43.10 | length 8.9
  L1 TOP w0.2: U43.10@89.751,64.35 90.586,64.35 90.95,64.714 90.95,67.496 90.7,67.746 v3(90.7,67.8)
  L6 BOT w0.2: R440.1@90,71.175 R428.2@90,70.2 89.4,69.6 89.4,68.814 90.375,67.838 90.662,67.838 v3(90.7,67.8)
LASER2_SPI_MISO: R434.1 U42.15 | length 17.4
  L1 TOP w0.2: U42.15@98.35,66.051 98.366,66.067 98.366,67.024 v3(98.398,67.056)
  L3 SIGNAL w0.2: v3(86.3,68.1) 86.307,68.1 86.657,68.45 97.11,68.45 98.36,67.201 98.36,67.094 v3(98.398,67.056)
  L6 BOT w0.2: v3(86.3,68.1) 86.768,68.568 86.768,70.682 86.3,71.15 R434.1@86.3,71.175
LASER2_SPI_MOSI: R432.1 U42.14 | length 23.4
  L1 TOP w0.2: U42.14@98.85,66.051 98.85,66.924 98.928,67.002 v3(98.928,67.056)
  L3 SIGNAL w0.2: v3(83.457,65.745) 84.809,65.745 84.914,65.85 91.307,65.85 91.371,65.787 97.765,65.787 98.89,66.911 98.89,67.018 v3(98.928,67.056)
  L6 BOT w0.2: v3(83.457,65.745) 83.457,65.8 83.21,66.047 83.21,67.605 85,69.395 R432.1@85,71.175
LASER2_SPI_nCS1: R427.2 R438.1 U43.8 | length 12.2
  L1 TOP w0.2: U43.8@89.751,63.35 89.767,63.366 90.255,63.366 91.6,64.711 v3(91.6,67.3)
  L6 BOT w0.2: R438.1@88.8,71.175 R427.2@88.8,70.2 88.2,69.6 88.2,68.636 89.05,67.786 89.05,67.514 89.614,66.95 91.243,66.95 91.593,67.3 v3(91.6,67.3)
LASER2_SPI_SCK: R436.1 U42.13 | length 4
  L6 BOT w0.2: R436.1@87.6,71.175 87.6,68.6 v3(88.6,67.6)
LASER2_SW_EXT_CS: R430.2 R444.1 U43.14 | length 9.5
  L1 TOP w0.2: U43.14@88.55,66.051 88.558,66.059 88.558,67.048 v3(88.565,67.056)
  L3 SIGNAL w0.2: v3(88.565,67.056) 89.508,67.056 89.795,66.768 92.117,66.768 v3@92.2,66.852
  L6 BOT w0.2: v3(92.075,66.768) 92.075,68.181 92,68.255 92,69.6 R430.2@92.6,70.2 R444.1@92.6,71.175
LASER2_SW_INT_CS: R429.2 R442.1 U43.12 | length 7.6
  L1 TOP w0.2: U43.12@89.751,65.35 89.789,65.388 89.8,65.388 89.8,66.264 89.85,66.314 89.85,67.296 89.8,67.346 v3(89.8,67.4)
  L6 BOT w0.2: v3@89.807,67.4 89.854,67.4 89.904,67.35 90.886,67.35 91.15,67.614 91.15,68.364 90.7,68.814 90.7,69.6 R429.2@91.3,70.2 R442.1@91.3,71.175
LASER_ADC_1: R528.2 U43.7
LASER_CHOSE: R175.2 R288.1 U42.11 U43.11 U43.21 | length 68.6
  L1 TOP w0.2: v3(84.844,64.307) 84.871,64.334 85.833,64.334 U43.21@85.849,64.35 ; U43.11@89.751,64.85 89.767,64.866 90.466,64.866 v3(90.5,64.9) ; U42.11@100.051,64.85 100.856,64.85 102.55,63.156 102.55,62.786 106.1,59.236 106.1,56.9 v3(110.8,52.2)
  L3 SIGNAL w0.2: v3(84.844,64.307) 85.437,64.9 v3(90.5,64.9) ; v3(110.8,52.2) 119.264,52.2 119.914,52.85 126.764,52.85 127.964,51.65 147.55,51.65 150.9,55 v3(151.2,55)
  L6 BOT w0.2: R288.1@150.45,55 v3(151.2,55)
LASER_DAC_LATCH: R65.2 U43.3 | length 24.3
  L6 BOT w0.2: R65.2@150.45,41.5 151.025,41.5 154.458,44.933 154.458,54.462 154.55,54.554 154.55,57.246 154.458,57.338 154.458,60.266 155,60.808 155,61.7 v3(155,63.5)
LASER_SPI_nCS1: R42.2 U43.1 | length 32.5
  L3 SIGNAL w0.2: v3(110.4,32.6) 112.95,30.05 135.217,30.05 136.017,30.85 136.786,30.85 137.05,31.114 137.05,31.586 137.314,31.85 137.686,31.85 137.95,31.586 137.95,31.214 138.214,30.95 138.85,30.95 v3(139.3,31.4)
  L6 BOT w0.2: v3(139.3,31.4) R42.2@139.3,32.175
LASER_SW_EXT_CS: R54.2 U43.6 | length 79.3
  L1 TOP w0.2: U43.6@89.05,62.149 89.05,61.938 89.088,61.9 v3(91.1,61.9)
  L3 SIGNAL w0.2: v3(91.1,61.9) 91.3,61.7 93.824,59.176 147.474,59.176 149.997,61.7 v3(152.5,64.203)
  L6 BOT w0.2: R54.2@150.45,53.2 151.2,53.2 152.058,54.058 152.058,55.456 152.15,55.548 152.15,56.252 152.058,56.344 152.058,61.7 152.058,63.761 v3(152.5,64.203) v3@152.5,64.213
LASER_SW_INT_CS: R53.2 U43.4 | length 41.8
  L3 SIGNAL w0.2: v3(92.904,61.82) 94.38,61.82 96.224,59.976 114.276,59.976 118.382,64.082 127.046,64.082 128.014,65.05 130.45,65.05 v3(130.9,64.6)
  L6 BOT w0.2: R53.2@130.9,63.825 v3(130.9,64.6)
LPM: Q23.1 R167.2 U54.R10
LSM6D_INT1: R71.2 R533.2 U52.4 | length 4.8
  L1 TOP w0.25: v2(135.45,28.1) 135.479,28.129 135.479,28.315 135.763,28.6 135.775,28.6
  L6 BOT w0.2: v2(135.45,28.1) 135.45,28.154 135.7,28.404 R71.2@135.7,32.175
MCP16502_HPM: R296.2 R569.2 R572.1 U54.N15
MCU_CONSOLE_RX: J17.3 R214.1 R291.1 | length 12.2
  L6 BOT w0.15: v3(127.9,71.9) 127.913,71.9 128.113,72.1 130.405,72.1 132.7,69.805 132.7,67.7 133.6,66.8 R291.1@133.6,63.825
MCU_CONSOLE_TX: J17.2 R213.1 R292.1 | length 13.9
  L1 TOP w0.15: v3(127.9,73) 127.912,72.988 128.464,72.988 R213.1@128.476,72.975
  L6 BOT w0.15: v3(127.9,73) 128.3,72.6 130.7,72.6 133.5,69.8 133.5,68.4 134.5,67.4 R292.1@134.5,63.825
MCU_HD4_I2C2_SCL: R39.1 R162.2 U16.2 U48.22
MCU_HD4_I2C2_SDA: R37.1 R163.2 U16.3 U48.23
MCU_HD4_I2C_EN: R67.2 R168.1 U16.5 | length 23.9
  L6 BOT w0.2: R67.2@150.45,38.8 151.436,38.8 155.258,42.622 155.258,54.13 155.35,54.222 155.35,60.008 155.258,60.1
MCU_I2C0_SCL: R14.2 R118.1 R391.1 U9.24 U36.4 | length 64.2
  L1 TOP w0.15: U9.24@146.3,26.135 v3(146.3,26.85) 147,27.55 R118.1@147,27.575 ; v3(152.4,26.1) 152.425,26.125 152.425,26.525 154.5,28.6 v3(154.5,42.5)
  L1 TOP w0.2: R391.1@136.225,46 v3(136.7,46) 137.15,46 137.35,45.8 U36.4@137.5,45.8 ; v3(151.3,55.9) 155,52.2 155,43 v3(154.5,42.5)
  L3 SIGNAL w0.15: v3(146.3,26.85) 147.23,26.85 147.98,26.1 v3(152.4,26.1)
  L3 SIGNAL w0.2: v3(136.7,46) 136.7,45.946 136.376,45.622 136.376,45.476 136.25,45.35 136.25,43.652 136.367,43.535 150.798,43.535 151.014,43.75 151.386,43.75 151.602,43.535 153.465,43.535 v3(154.5,42.5)
  L6 BOT w0.2: R14.2@150.45,55.9 v3(151.3,55.9)
MCU_I2C0_SDA: R13.2 R117.1 R392.1 U9.27 U36.5 | length 47.2
  L1 TOP w0.15: U9.27@145.1,26.135 145.115,26.15 v3(145.115,27.061) 145.157,27.104 145.157,27.533 R117.1@145.2,27.575 ; v3(151.2,47) 151.2,45.701 152,44.901 152,42.767 152.4,42.367 152.4,34.582 152.235,34.418 152.235,27.603 151.732,27.1 v3(151.7,27.1)
  L1 TOP w0.2: R392.1@136.225,45.1 v3(136.7,45.1) ; v3@136.8,45 U36.5@137.5,45
  L3 SIGNAL w0.15: v3(145.115,27.061) 145.629,27.575 147,27.575 147.475,27.1 v3(151.7,27.1)
  L3 SIGNAL w0.2: v3(136.7,45.1) 136.754,45.1 137.078,44.776 149.809,44.776 151.2,46.167 v3(151.2,47)
  L6 BOT w0.2: R13.2@150.45,46.9 151.046,46.9 151.146,47 v3(151.2,47)
MCU_JTAGSEL: TP2.0 U2.104
MCU_MRAM_QSPI_CLK: R24.2 U35.6 | length 7.8
  L1 TOP w0.2: v3(132.7,64.6) 133.6,64.6 135.7,62.5 135.7,61.781 134.279,60.36 U35.6@133.821,60.36
  L6 BOT w0.2: R24.2@132.7,63.825 v3(132.7,64.6)
MCU_MRAM_QSPI_IO0: R23.2 U35.5 | length 7.6
  L1 TOP w0.2: v3(128.2,64.6) 128.825,64.6 131.795,61.63 U35.5@133.821,61.63
  L6 BOT w0.2: R23.2@128.2,63.825 v3(128.2,64.6)
MCU_MRAM_QSPI_IO1: R21.2 U35.2 | length 10.5
  L1 TOP w0.2: U35.2@141.137,59.09 140.01,59.09 139.6,59.5 139.6,61.534 142.666,64.6 v3(144.3,64.6)
  L6 BOT w0.2: R21.2@144.3,63.825 v3(144.3,64.6)
MCU_MRAM_QSPI_IO2: R27.2 U35.3 | length 51.9
  L1 TOP w0.2: U35.3@141.137,60.36 141.167,60.33 145.07,60.33 v3(145.1,60.3)
  L3 SIGNAL w0.2: v3(117,61.5) 143.9,61.5 v3(145.1,60.3)
  L6 BOT w0.2: v3(117,61.5) 114.948,61.5 112.102,58.654 112.03,58.654 111.854,58.478 111.854,58.406 111.2,57.752 111.2,55.884 112.984,54.1 113.852,54.1 116.352,51.6 R27.2@119.475,51.6
MCU_MRAM_QSPI_IO3: R43.1 U35.7
MCU_nRESET: J2.6 R46.1 U2.83 | length 25.2
  L1 TOP w0.2: R46.1@145.525,51.1 146.2,51.1 146.362,51.262 146.362,52.062 147.2,52.9 147.2,56.631 147.6,57.031 147.6,66.9 151.5,70.8 151.5,71.68 151.72,71.9
  L6 BOT w0.2: U2.83@145,52.05 145.019,52.069 146.369,52.069 v3(146.4,52.1)
MCU_OSCIN: C15.2 R64.1 R82.2 XC2.3 | length 8.1
  L6 BOT w0.2: C15.2@114.85,32.6 114.785,32.665 114.785,33.94 XC2.3@114.325,34.4 114.325,34.55 115.4,35.625 115.4,35.783 115.512,35.894 116.883,35.894 117.102,35.675 118.5,35.675 118.487,35.663 118.513,35.638 119.437,35.638 R64.1@119.475,35.6
MCU_OSCOUT: C16.2 R66.1 R82.1 XC2.1 | length 5.9
  L6 BOT w0.2: C16.2@116,39.9 116,39.1 116.075,39.025 116.075,38.9 116.475,38.5 116.6,38.5 116.625,38.475 XC2.1@116.625,38.2 117.175,37.65 117.175,37.025 117.475,36.725 118.5,36.725 118.537,36.763 119.438,36.763 R66.1@119.475,36.8
MCU_PRAM_SPI1_nCS: R78.2 R529.1 U37.2 | length 0.7
  L6 BOT w0.2: R78.2@150.425,56.8 v3(151.175,56.8)
MCU_PRAM_SW_nEN: R286.1 R397.1 U37.15 | length 24.3
  L1 TOP w0.2: U37.15@126.647,50.575 127.174,50.575 127.346,50.403 127.476,50.403 128.092,49.787 128.092,49.342 127.45,48.7 R397.1@127.425,48.7 ; v3(151.2,52.3) 152,51.5 152,50.002 152.4,49.602 152.4,47.568 152.7,47.268 152.7,45.863 153.175,45.388 153.175,43.253 153.575,42.853 153.575,33.665 153.01,33.1
  L6 BOT w0.2: R286.1@150.45,52.3 v3(151.2,52.3)
MCU_RAM_QSPI_nCS: R19.2 R388.1 U35.1 | length 12.4
  L1 TOP w0.2: v3(141.6,64.6) 138.9,61.9 138.9,59.02 140.1,57.82 141.594,57.82 142.014,57.4 R388.1@143.175,57.4
  L6 BOT w0.2: R19.2@141.6,63.825 v3(141.6,64.6)
MCU_RTC_CLKOUT: R49.2 R389.1 U36.3 | length 55.4
  L1 TOP w0.2: R389.1@136.225,46.9 136.277,46.9 136.577,46.6 U36.3@137.5,46.6
  L6 BOT w0.2: 103.187,28.352 108,33.166 108,57.948 111.056,61.004 111.106,61.004 111.802,61.7 112.25,62.148 112.25,62.184 113.651,63.586 114.522,63.586 116.186,65.25 125.6,65.25 126.4,64.45 R49.2@126.4,63.825
MCU_RTC_INT: R50.2 R390.1 U36.7 | length 30.8
  L1 TOP w0.2: U36.7@139.7,45.8 140.923,45.8 141.123,46 141.175,46 141.175,45.225 141.7,44.7 142.9,44.7 144.1,43.5 145.9,43.5 147.6,45.2 147.6,56.466 149.1,57.966 149.1,65.2
MCU_SENSOR1_nIRQ: R109.1 R169.2
MCU_SENSOR2_nIRQ: R110.1 R179.2 | length 0.7
  L1 TOP w0.3: R110.1@130.361,17.518 130.511,17.368 130.809,17.368 130.959,17.218 v2(130.986,17.218)
MCU_SENSOR3_nIRQ: R81.2 R114.1
MCU_SENSOR4_nIRQ: R112.2 R116.1
MCU_SOL_1_IN1: R12.2 U30.3 | length 15.8
  L1 TOP w0.2: 150.66,33.7 150.66,33.753 150.45,33.964 150.45,40.052 150.66,40.262 150.66,42.426 150.75,42.516 150.75,43.486 151.2,43.936 v3(151.2,45.1)
  L1 TOP w0.28: U30.3@69.965,16.535 69.965,17.06 70.715,17.81 71.103,17.81 72.013,18.72
  L6 BOT w0.2: R12.2@150.45,45.1 v3(151.2,45.1)
MCU_SOL_1_IN2: R69.2 U30.2 | length 3.1
  L1 TOP w0.28: U30.2@71.235,16.535 71.235,17.06 72.493,18.318
  L6 BOT w0.2: v3(140.2,31.4) R69.2@140.2,32.175
MCU_SOL_2_IN1: R290.1 U31.3 | length 3.3
  L1 TOP w0.28: U31.3@75.465,16.523 75.465,17.048 76.215,17.798 76.603,17.798 77.513,18.708 77.5,18.72
MCU_SOL_2_IN2: R289.1 U31.2 | length 31.8
  L1 TOP w0.2: 149.6,32.4 149.306,32.4 148.9,32.806 148.9,56.3 151.175,58.575 v3(151.175,58.6)
  L1 TOP w0.28: U31.2@76.735,16.523 76.735,16.96 76.889,17.114 77.206,17.114 77.37,17.278 77.37,17.397 78.9,18.927
  L6 BOT w0.2: R289.1@150.425,58.6 v3(151.175,58.6)
MCU_SOL_3_IN1: R32.2 U32.3 | length 76.4
  L1 TOP w0.28: U32.3@80.965,16.535 80.965,17.06 81.715,17.81 82.592,17.81 83.116,18.334 83.127,18.334 83.574,18.782 83.574,20.631 83.6,20.656
  L3 SIGNAL w0.2: 83.6,34.5 83.636,34.536 84.1,34.536 84.564,35 86.261,35 86.476,35.215 88.615,35.215 91.7,38.3 106.683,38.3 v3(106.7,38.283)
  L6 BOT w0.2: v3(106.7,38.283) 106.7,57.213 110.891,61.404 110.94,61.404 111.236,61.7 111.85,62.314 111.85,62.35 115.15,65.65 127.9,65.65 129.1,64.45 R32.2@129.1,63.825
MCU_SOL_3_IN2: R30.2 U32.2 | length 69
  L1 TOP w0.28: U32.2@82.235,16.535 82.235,17.056 82.389,17.21 82.671,17.21 83.315,17.854 83.326,17.854 84.054,18.583 84.054,20.254 84.6,20.8
  L3 SIGNAL w0.2: 84.6,34.4 86.227,34.4 86.642,34.815 88.815,34.815 91.042,37.042 v3(109.724,37.042)
  L6 BOT w0.2: v3(109.724,37.042) 109.724,57.975 111.553,59.804 111.603,59.804 113.45,61.651 113.45,61.687 114.149,62.386 115.84,62.386 117.279,63.825 R30.2@123.7,63.825
MCU_SOL_4_IN1: R34.2 U33.3 | length 3.2
  L1 TOP w0.28: U33.3@86.465,16.535 86.465,17.06 87.215,17.81 87.81,17.81 88.513,18.512
MCU_SOL_4_IN2: R33.2 U33.2 | length 2.3
  L1 TOP w0.28: U33.2@87.735,16.535 87.735,17.056 88.993,18.314
MCU_SOM_GPIO_A: R283.1 R478.1 | length 0.8
  L6 BOT w0.2: v3(145.6,31.4) R283.1@145.6,32.175
MCU_SOM_GPIO_B: R284.1 R474.1 | length 21.7
  L6 BOT w0.2: R284.1@150.45,40.6 151.025,40.6 154.858,44.433 154.858,54.296 154.95,54.388 154.95,57.412 154.858,57.504 154.858,60.1
MCU_SPI0_MISO: R28.1 R80.1 U41.4 U42.7 | length 10.1
  L1 TOP w0.2: U42.7@100.051,62.85 100.856,62.85 102.1,61.606 v3(102.1,61.6) ; U41.4@108.75,62.149 108.766,62.133 108.766,61.434 v3(108.8,61.4)
  L3 SIGNAL w0.2: v3(102.1,61.6) 102.138,61.562 102.502,61.562 102.664,61.4 v3(108.8,61.4)
MCU_SPI0_MOSI: R29.1 U41.3 U42.6 | length 40
  L1 TOP w0.2: U42.6@99.35,62.149 99.35,61.807 100.457,60.7 v3(100.5,60.7) ; U41.3@108.25,62.149 108.25,60.804 108.574,60.481 108.574,56.726 111.8,53.5 111.8,34.495 111.303,33.997
  L3 SIGNAL w0.2: v3(100.5,60.7) 104.393,60.7 104.666,60.426 v3(108.574,60.426)
MCU_SPI0_SCK: R31.1 U41.1 U42.9 | length 8.2
  L1 TOP w0.2: U42.9@100.051,63.85 101.17,63.85 101.916,63.104 101.916,62.784 v3(102.7,62) ; v3(106.5,62.1) 107.209,62.1 107.25,62.141 U41.1@107.25,62.149
  L3 SIGNAL w0.2: v3(102.7,62) 106.346,62 106.446,62.1 v3(106.5,62.1)
MCU_SWDIO: J2.8 R61.1 | length 21.8
  L6 BOT w0.2: 146.64,71.9 148.349,70.191 149.571,70.191 151.012,68.75 151.012,64.388 151.658,63.742 151.658,61.7 151.658,56.178 151.75,56.086 151.75,55.714 151.658,55.622 151.658,54.224 151.534,54.1 R61.1@150.45,54.1
MCU_TRACESWO: J2.4 R60.1 | length 47.8
  L6 BOT w0.2: R60.1@147.4,32.2 153.1,32.2 156.069,35.169 156.469,35.169 157,35.7 157,64.364 157.15,64.514 157.15,66.35 156.683,66.817 156.683,66.983 156.7,67 156.7,67.764 156.55,67.914 156.55,68.414 157,68.864 157,71.7 156.8,71.9
  other v3: 155.5,34.6
MCU_TST: TP1.0 U2.85
MCU_TSWCLK: J2.5 R63.1 | length 25.2
  L6 BOT w0.2: R63.1@150.45,48.7 151,48.7 152.858,50.558 152.858,55.125 152.95,55.217 152.95,56.583 152.858,56.675 152.858,60.928 153.35,61.42 153.35,61.7 153.35,70.99 154.26,71.9
MCU_UART0_RX_SOM_TX: R17.2 R563.1 | length 26.3
  L1 TOP w0.2: 149.3,32.972 149.3,55.8 151.175,57.675 v3(151.175,57.7)
  L6 BOT w0.2: R17.2@150.425,57.7 v3(151.175,57.7)
MCU_UART0_TX_SOM_RX: R18.2 R564.1
MCU_UART1_RX_SOM_TX: R15.2 R561.1 | length 25.7
  L1 TOP w0.2: 148,35.9 148,56.3 v3(151.2,59.5)
  L6 BOT w0.2: R15.2@150.425,59.5 v3(151.2,59.5)
MCU_UART1_TX_SOM_RX: R16.2 R562.1 | length 0.8
  L6 BOT w0.2: v3(142,31.4) R16.2@142,32.175
MIPI_CK_N: R349.2 U54.N20
MIPI_CK_P: R351.2 U54.N21
MIPI_D0_N: R353.2 U54.R18
MIPI_D0_P: R355.2 U54.P18
MIPI_D1_N: R356.2 U54.R20
MIPI_D1_P: R357.2 U54.R21
NetC4_2: C4.2 U1.10 | length 1.7
  L1 TOP w0.25: C4.2@16.2,33 16.36,32.84 16.36,32.432 16.883,31.909 16.883,31.634 U1.10@16.908,31.609
NetC5_2: C5.2 U1.7 | length 1.7
  L1 TOP w0.25: U1.7@18.308,31.609 18.333,31.634 18.333,31.833 18.954,32.454 18.954,32.929 C5.2@19,32.975
NetC11_2: C11.2 R44.1 R45.1 R46.2
NetC14_2: C14.2 R83.2 U2.140
NetC55_1: C55.1 L1.1 U5.6 U5.7 | length 0.8
  L1 TOP w0.2: v2(131.934,26.629) 131.988,26.629 132.059,26.7 C55.1@132.725,26.7
  other v2: 136.5,23.8
NetC55_2: C55.2 U5.3 | length 1.9
  L1 TOP w0.25: C55.2@133.775,26.7 133.8,26.7 134.4,26.1 U5.3@135.425,26.1
NetC56_1: C56.1 L2.1 U6.6 U6.7 | length 6.7
  L1 TOP w0.2: v2(131.834,17.729) 131.888,17.729 131.959,17.8 C56.1@132.625,17.8
  L3 SIGNAL w0.2: v2(131.834,17.729) 133.757,17.729 136.362,15.125 136.362,14.938 v2(136.4,14.9)
NetC56_2: C56.2 U6.3 | length 1.9
  L1 TOP w0.25: C56.2@133.675,17.8 133.7,17.8 134.3,17.2 U6.3@135.325,17.2
NetC59_2: C59.2 U5.2 | length 2.1
  L1 TOP w0.25: C59.2@133.775,27.6 133.813,27.6 134.088,27.325 134.147,27.325 134.872,26.6 U5.2@135.425,26.6
NetC60_2: C60.2 U6.2 | length 2.1
  L1 TOP w0.25: C60.2@133.675,18.7 133.713,18.7 133.988,18.425 134.047,18.425 134.772,17.7 U6.2@135.325,17.7
NetC77_1: C77.1 L3.1 U7.6 U7.7 | length 0.7
  L1 TOP w0.2: v2(121.7,26.1) 121.725,26.125 122.1,26.125 C77.1@122.275,26.3
  other v2: 126.05,23.4
NetC77_2: C77.2 U7.3 | length 1.9
  L1 TOP w0.25: C77.2@123.325,26.3 123.35,26.3 123.95,25.7 U7.3@124.975,25.7
NetC78_1: C78.1 L4.1 U8.6 U8.7 | length 0.8
  L1 TOP w0.2: v2(121.52,17.348) 122.257,17.348 C78.1@122.336,17.268
  other v2: 126.086,14.518
NetC78_2: C78.2 U8.3 | length 1.9
  L1 TOP w0.25: C78.2@123.361,17.418 123.386,17.418 123.986,16.818 U8.3@125.011,16.818
NetC81_2: C81.2 U7.2 | length 2.1
  L1 TOP w0.25: C81.2@123.325,27.2 123.364,27.2 123.639,26.925 123.697,26.925 124.422,26.2 U7.2@124.975,26.2
NetC82_2: C82.2 U8.2 | length 2.1
  L1 TOP w0.25: C82.2@123.361,18.318 123.4,18.318 123.675,18.043 123.733,18.043 124.458,17.318 U8.2@125.011,17.318
NetC87_2: C87.2 R135.2 U10.3 | length 6.7
  L6 BOT w0.28: R135.2@112.4,22.5 112.42,22.5 112.579,22.659 112.579,22.79 112.749,22.96 112.778,22.96 113.065,23.247 113.065,23.285 113.215,23.435 C87.2@113.38,23.6 ; C87.2@113.4,23.6 113.973,23.6 114.137,23.436 114.137,22.177 114.619,21.695 115.266,21.695 115.43,21.531 115.43,21.221 115.594,21.057 115.911,21.057 116.065,20.902 U10.3@116.065,20.465
NetC89_2: C89.2 R136.2 U11.3 | length 6
  L1 TOP w0.28: U11.3@115.085,21.229 115.482,21.625 116.343,21.625 116.507,21.789 116.507,23.436 116.671,23.6 117.62,23.6 117.935,23.285 117.935,23.247 118.222,22.96 118.251,22.96 118.421,22.79 118.421,22.659 118.58,22.5 R136.2@118.6,22.5
NetC92_2: C92.2 R141.2 U10.5 | length 2.9
  L6 BOT w0.28: R141.2@112.4,25.4 112.42,25.4 112.579,25.559 112.579,25.69 112.749,25.86 112.778,25.86 113.065,26.147 113.065,26.185 113.38,26.5 C92.2@113.4,26.5 113.516,26.384 114.641,26.384 U10.5@114.641,26.4
NetC94_2: C94.2 R142.2 U11.5 | length 3.6
  L1 TOP w0.28: U11.5@116.205,25.735 116.359,25.889 116.359,26.4 116.359,26.384 117.484,26.384 C94.2@117.6,26.5 117.62,26.5 117.779,26.341 117.779,26.321 117.935,26.165 117.935,26.147 118.222,25.86 118.24,25.86 118.421,25.679 118.421,25.559 118.58,25.4 R142.2@118.6,25.4
NetC98_2: C98.2 R147.2 U12.3 | length 6
  L6 BOT w0.28: R147.2@112.4,13.1 112.42,13.1 112.579,13.259 112.579,13.39 112.749,13.56 112.778,13.56 113.065,13.847 113.065,13.885 113.38,14.2 114.329,14.2 114.493,14.036 114.493,12.389 114.657,12.225 115.518,12.225 U12.3@115.915,11.829
NetC100_2: C100.2 R148.2 U13.3 | length 6.8
  L1 TOP w0.28: U13.3@114.935,11.065 115.085,11.215 115.085,11.829 115.482,12.225 116.343,12.225 116.507,12.389 116.507,14.036 116.671,14.2 117.62,14.2 117.935,13.885 117.935,13.847 118.222,13.56 118.251,13.56 118.421,13.39 118.421,13.259 118.58,13.1 R148.2@118.6,13.1
NetC102_2: C102.2 R153.2 U12.5 | length 3.6
  L6 BOT w0.28: R153.2@112.4,16 112.42,16 112.579,16.159 112.579,16.279 112.76,16.46 112.778,16.46 113.065,16.747 113.065,16.765 113.221,16.921 113.221,16.941 113.38,17.1 C102.2@113.4,17.1 113.516,16.984 114.641,16.984 114.641,17 114.795,16.846 U12.5@114.795,16.335
NetC104_2: C104.2 R154.2 U13.5 | length 4.3
  L1 TOP w0.28: R154.2@118.6,16 118.58,16 118.421,16.159 118.421,16.179 118.265,16.335 118.265,16.353 117.978,16.64 117.96,16.64 117.779,16.821 117.779,16.941 117.62,17.1 C104.2@117.6,17.1 117.484,16.984 116.359,16.984 U13.5@116.359,17 ; U13.5@116.359,17 116.359,16.489 U13.5@116.205,16.335 116.205,16.846 U13.5@116.359,17
NetC120_2: C120.2 C121.2 U22.E4@54.086,56.6
NetC137_2: C137.2 U23.10 | length 1.7
  L1 TOP w0.25: C137.2@16.2,42.175 16.2,42.136 16.485,41.851 16.485,41.473 16.883,41.075 16.883,40.834 U23.10@16.908,40.809
NetC138_2: C138.2 U23.7 | length 1.7
  L1 TOP w0.25: U23.7@18.308,40.809 18.333,40.834 18.333,41.033 18.954,41.654 18.954,42.129 C138.2@19,42.175
NetC141_2: C141.2 JP4.2 JP5.2 JP6.1 R222.2 U24.5
  other v2: 4.4,30.9 5.3,30.9 4.4,31.5 5.3,31.5
NetC145_2: C145.2 U24.10 | length 1.7
  L1 TOP w0.25: C145.2@6.4,33.5 6.56,33.34 6.56,32.932 7.083,32.409 7.083,32.134 U24.10@7.108,32.109
NetC146_2: C146.2 U24.7 | length 1.7
  L1 TOP w0.25: U24.7@8.508,32.109 8.533,32.134 8.533,32.333 9.154,32.954 9.154,33.429 C146.2@9.2,33.475
NetC153_2: C153.2 U25.10 | length 1.7
  L1 TOP w0.25: C153.2@16.2,51.575 16.2,51.536 16.485,51.251 16.485,50.873 16.883,50.475 16.883,50.234 U25.10@16.908,50.209
NetC154_2: C154.2 U25.7 | length 1.7
  L1 TOP w0.25: U25.7@18.308,50.209 18.333,50.234 18.333,50.433 18.954,51.054 18.954,51.529 C154.2@19,51.575
NetC155_2: C155.2 U26.10 | length 1.7
  L1 TOP w0.25: C155.2@6.4,61 6.56,60.84 6.56,60.432 7.083,59.909 7.083,59.634 U26.10@7.108,59.609
NetC156_2: C156.2 U26.7 | length 1.7
  L1 TOP w0.25: U26.7@8.508,59.609 8.533,59.634 8.533,59.833 9.154,60.454 9.154,60.929 C156.2@9.2,60.975
NetC166_2: C166.2 U27.10 | length 1.7
  L1 TOP w0.25: C166.2@16.2,60.975 16.2,60.936 16.485,60.651 16.485,60.273 16.883,59.875 16.883,59.634 U27.10@16.908,59.609